# Altium PCB Transmitter.PcbDoc
Units mil, origin at the board's own origin, x right, y up, seen from the top; angles counter-clockwise.
Board outline 3115 x 2620 mil, 4 copper layers (Top Layer 1, Top Layer, Bottom Layer, Bottom Layer 1), stack 23.756 mil thick; 25 components, 10 nets, 67 pads, 13 vias.
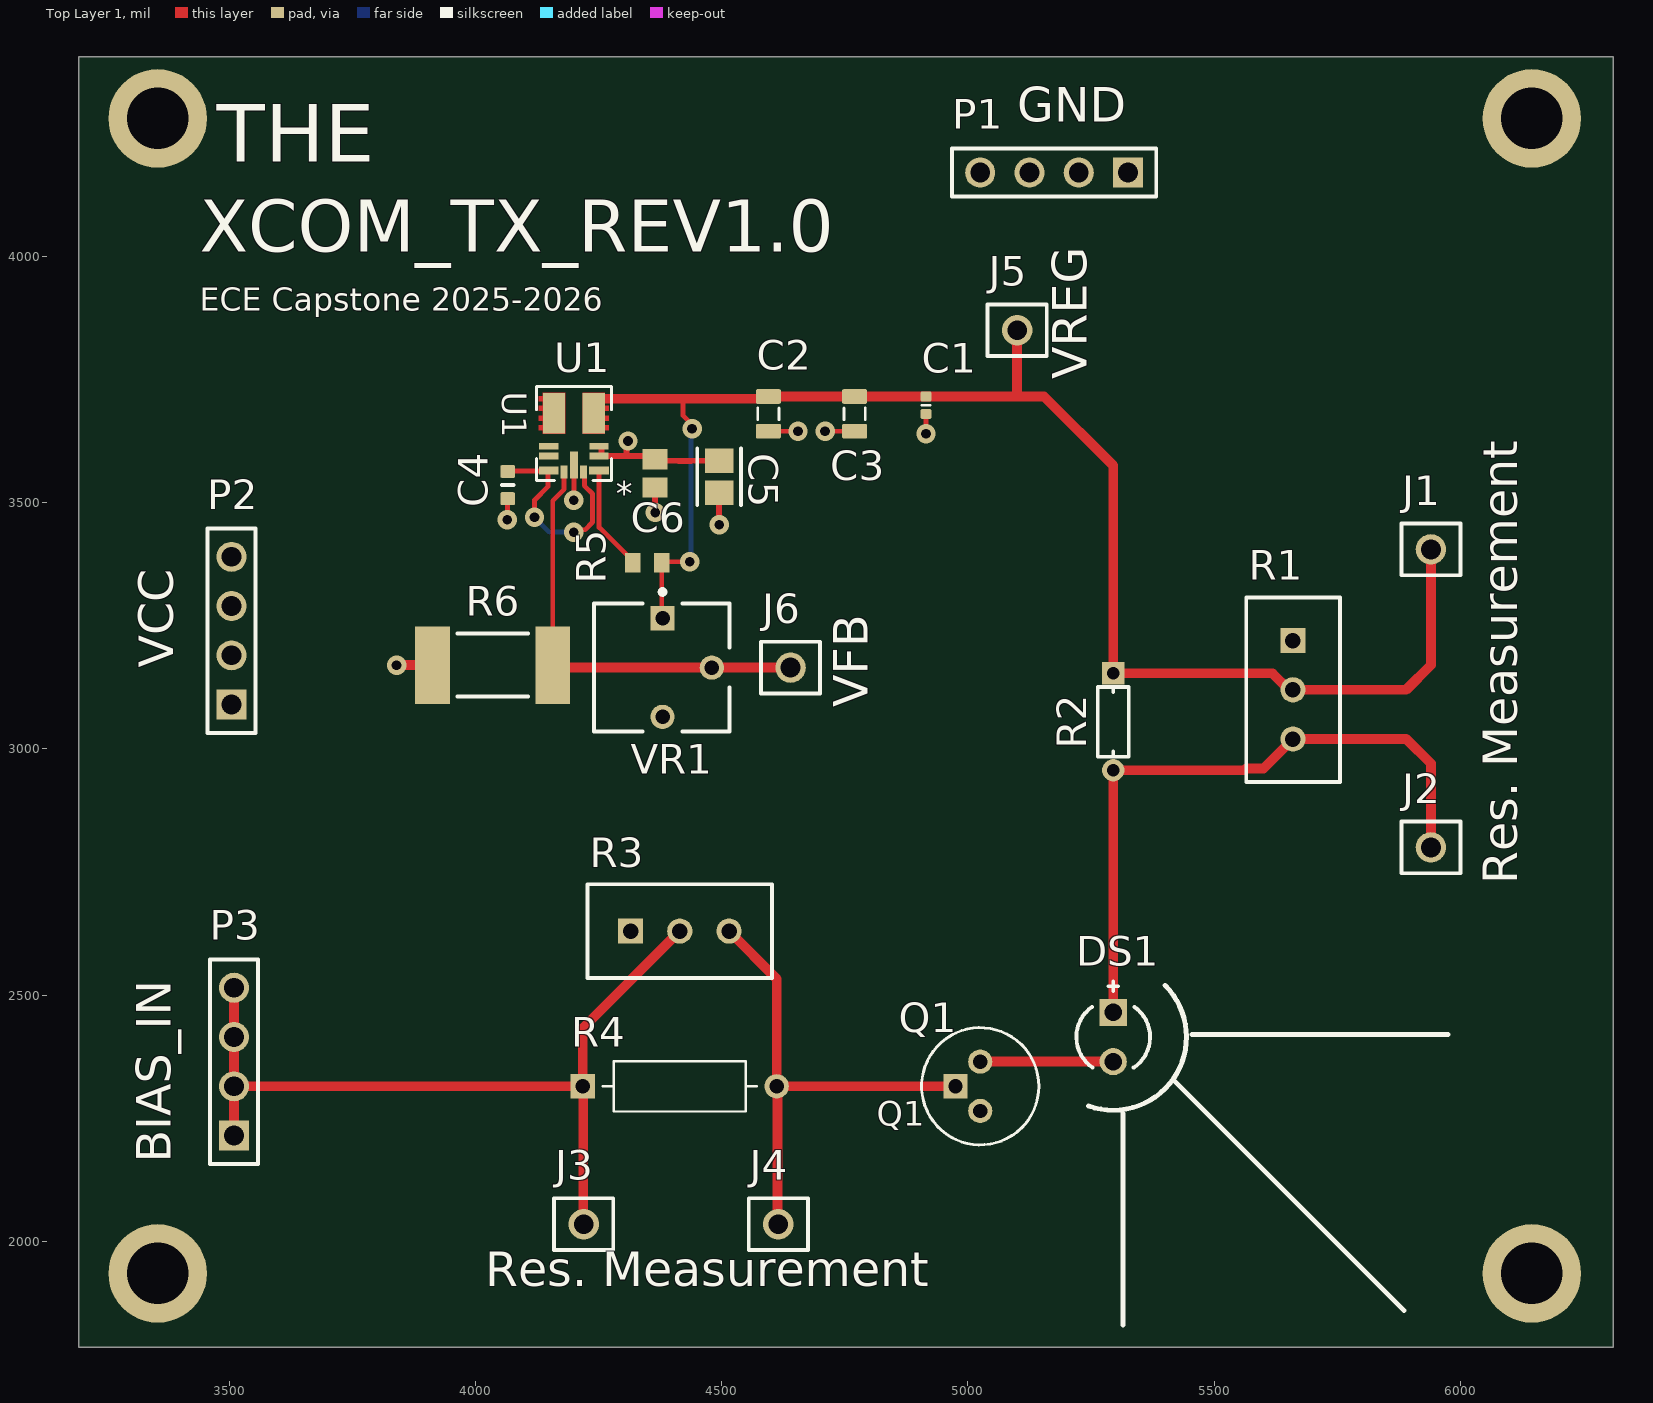
[diagram p0: Top Layer 1 view]
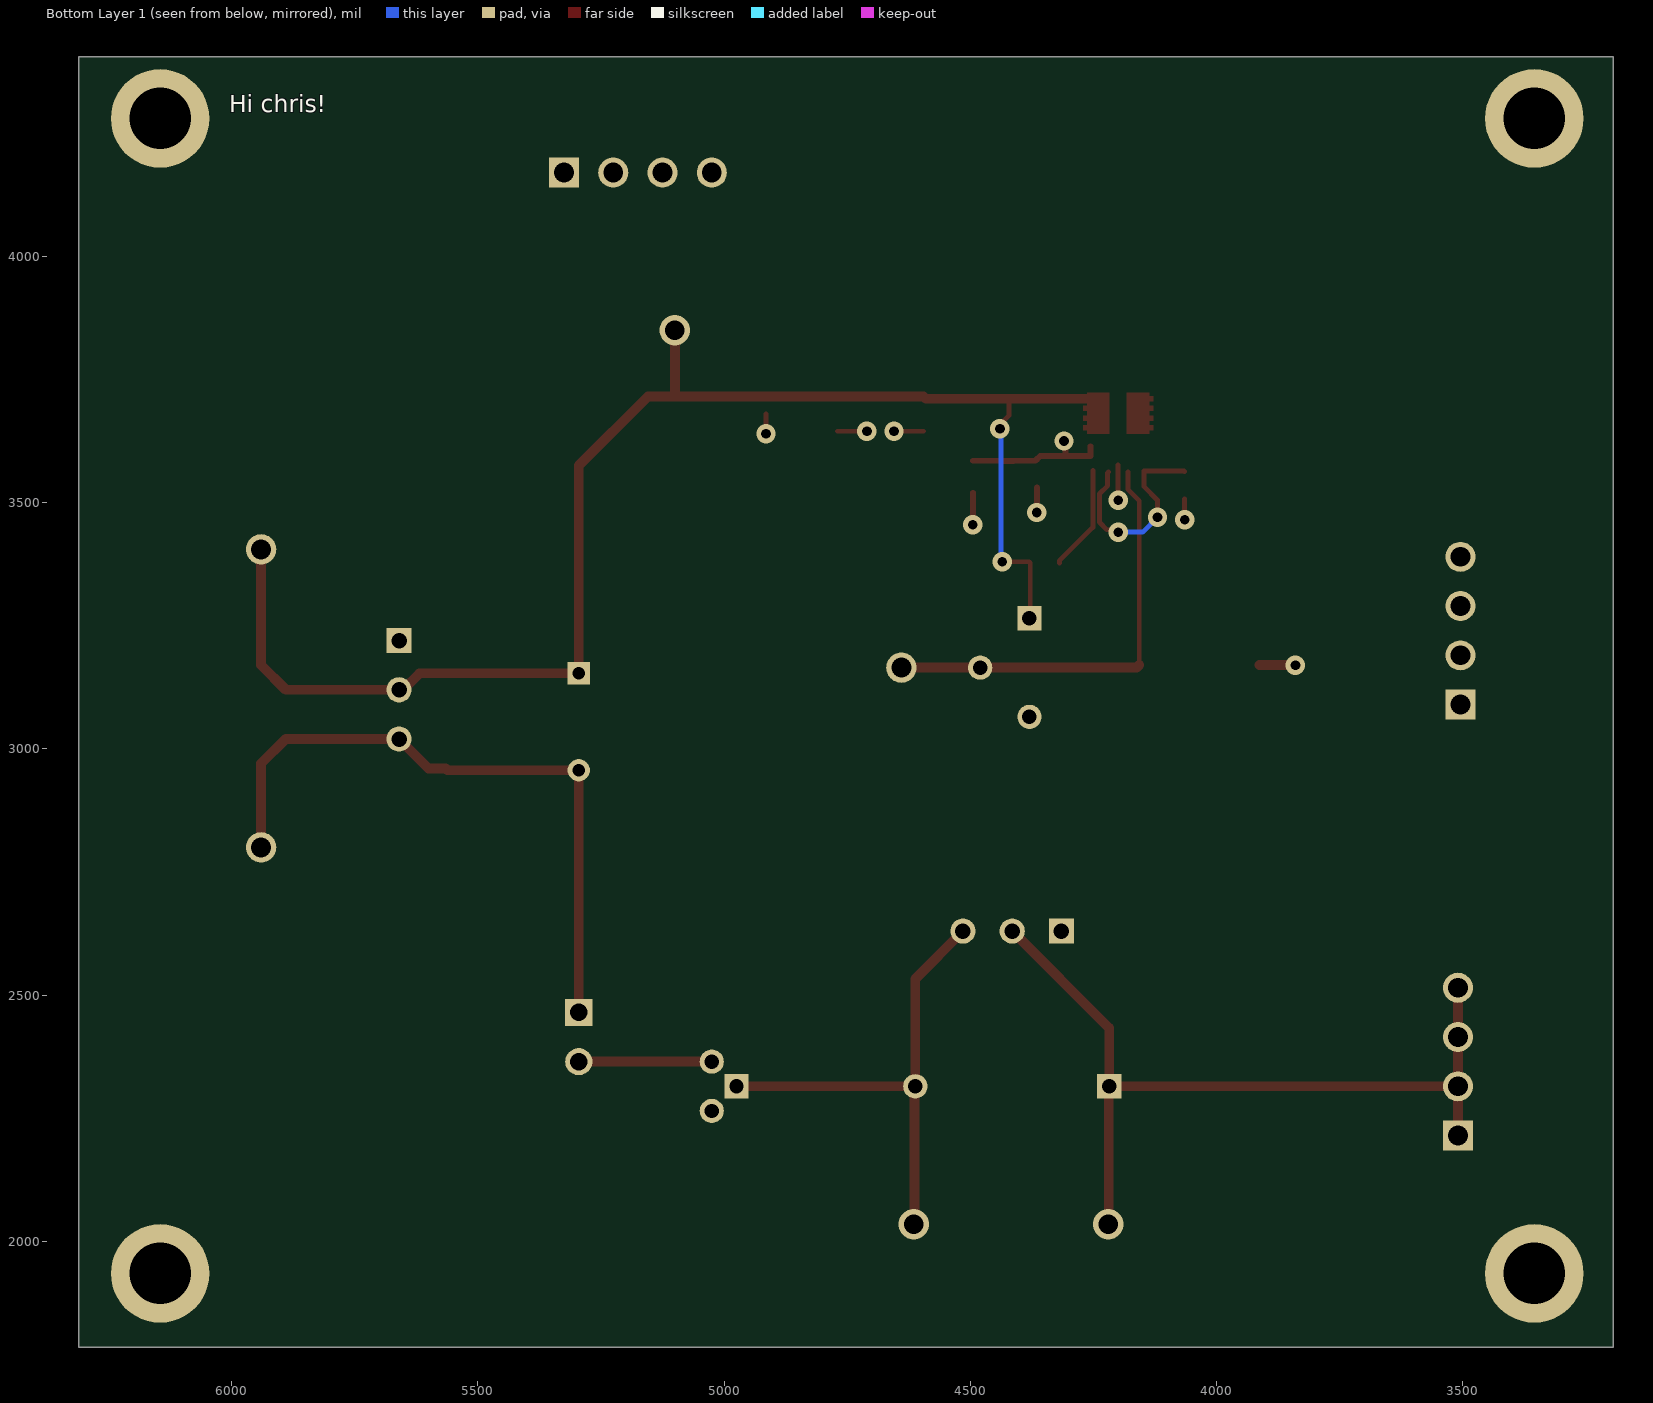
[diagram p1: Bottom Layer 1 view, seen from below]
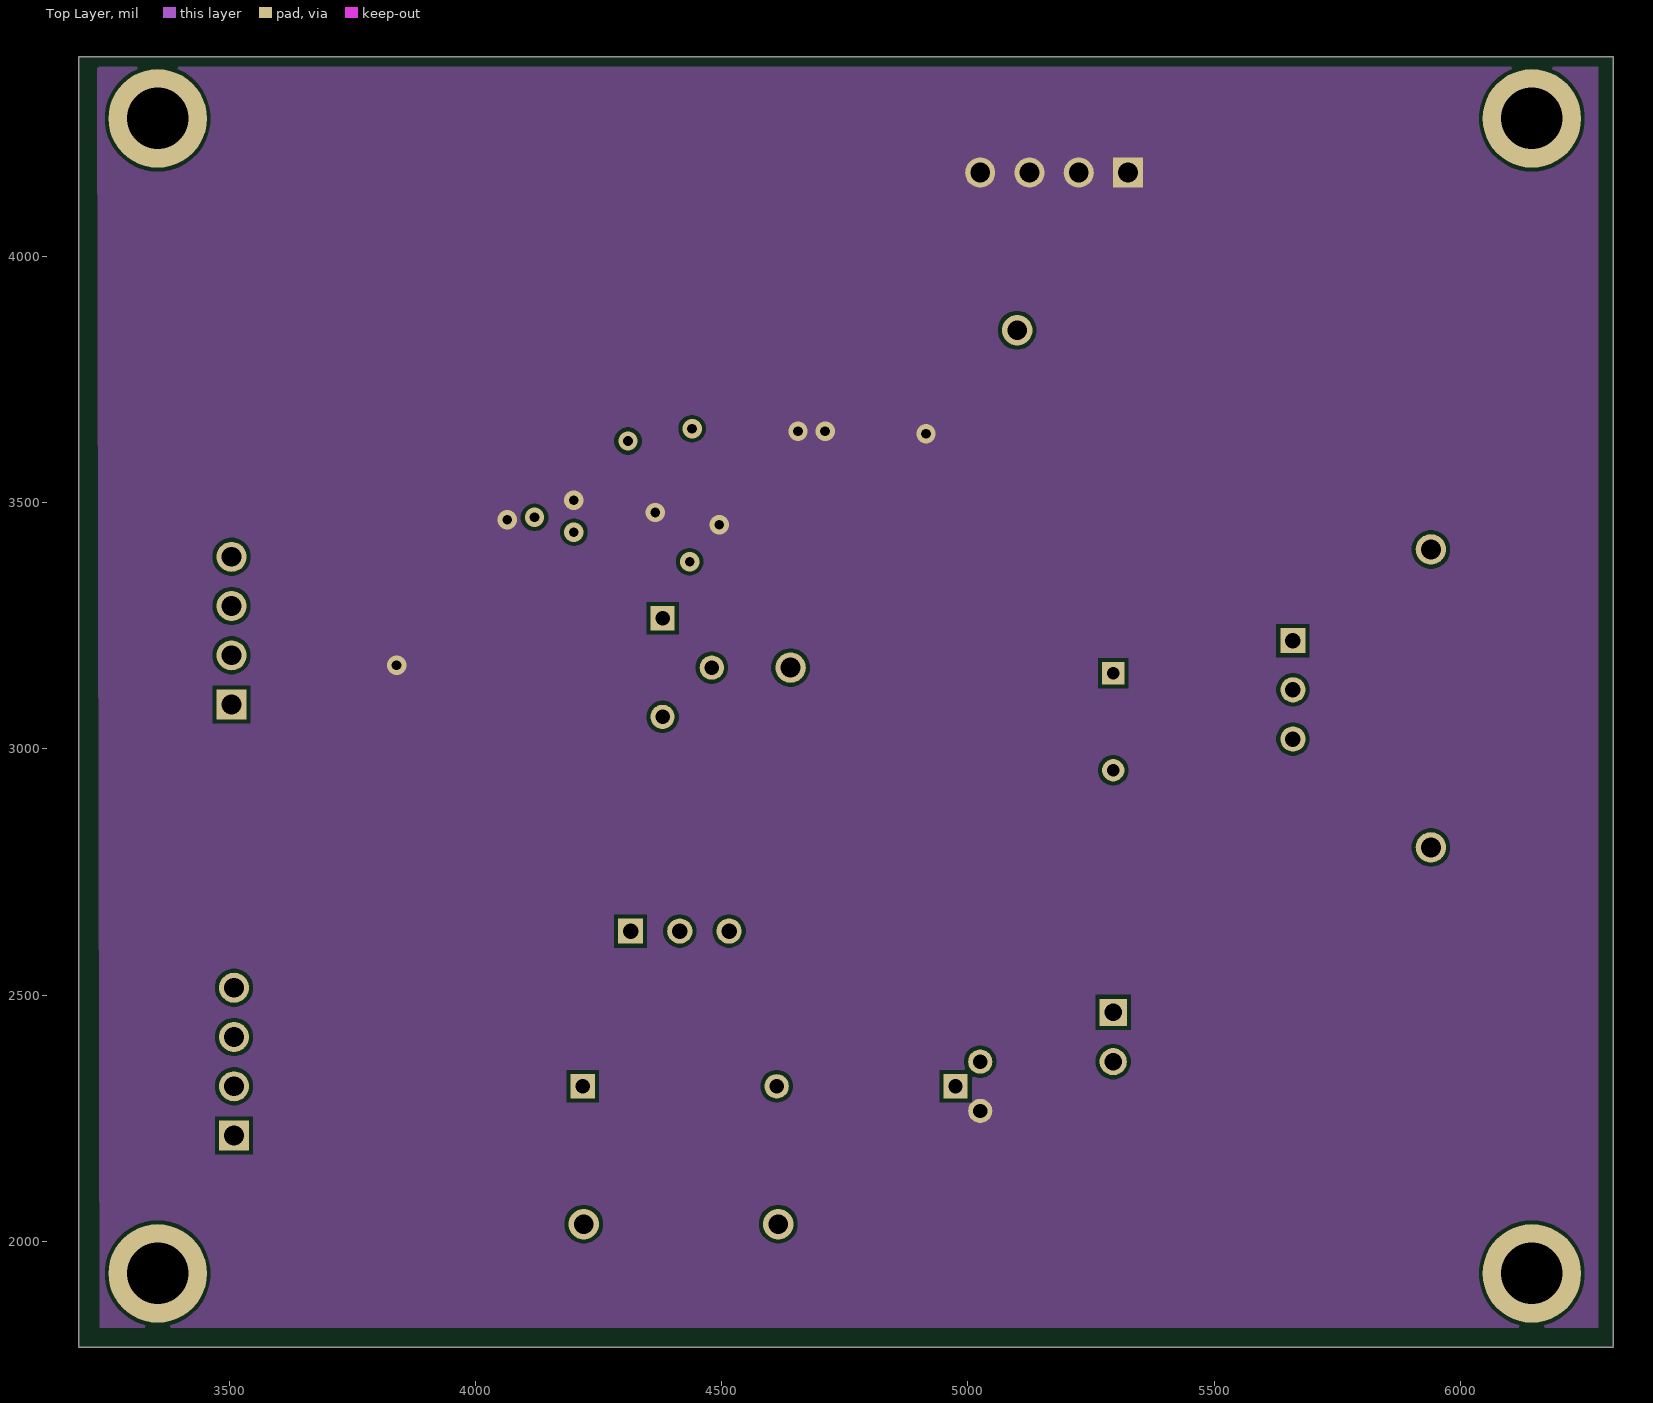
[diagram p2: Top Layer]
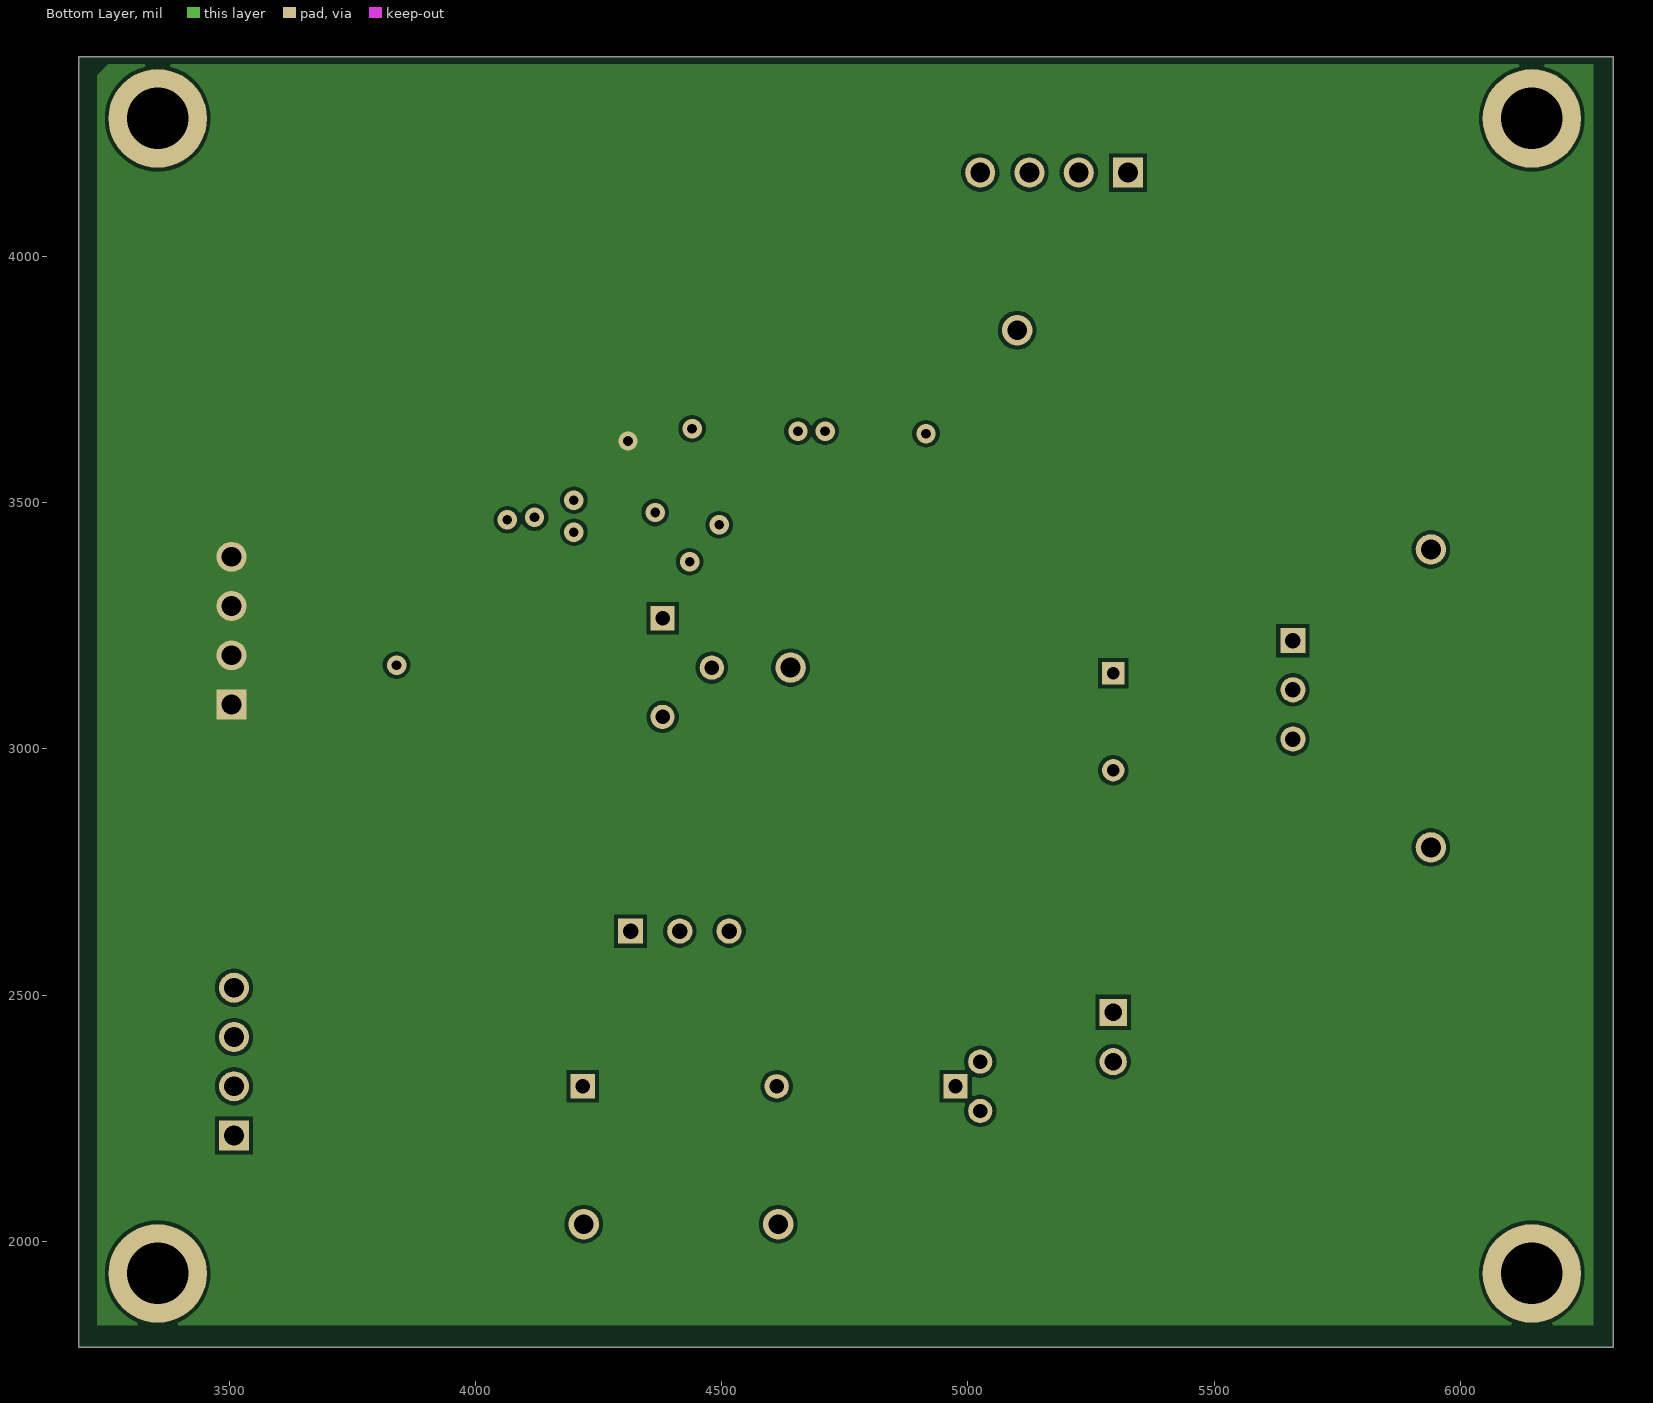
[diagram p3: Bottom Layer]
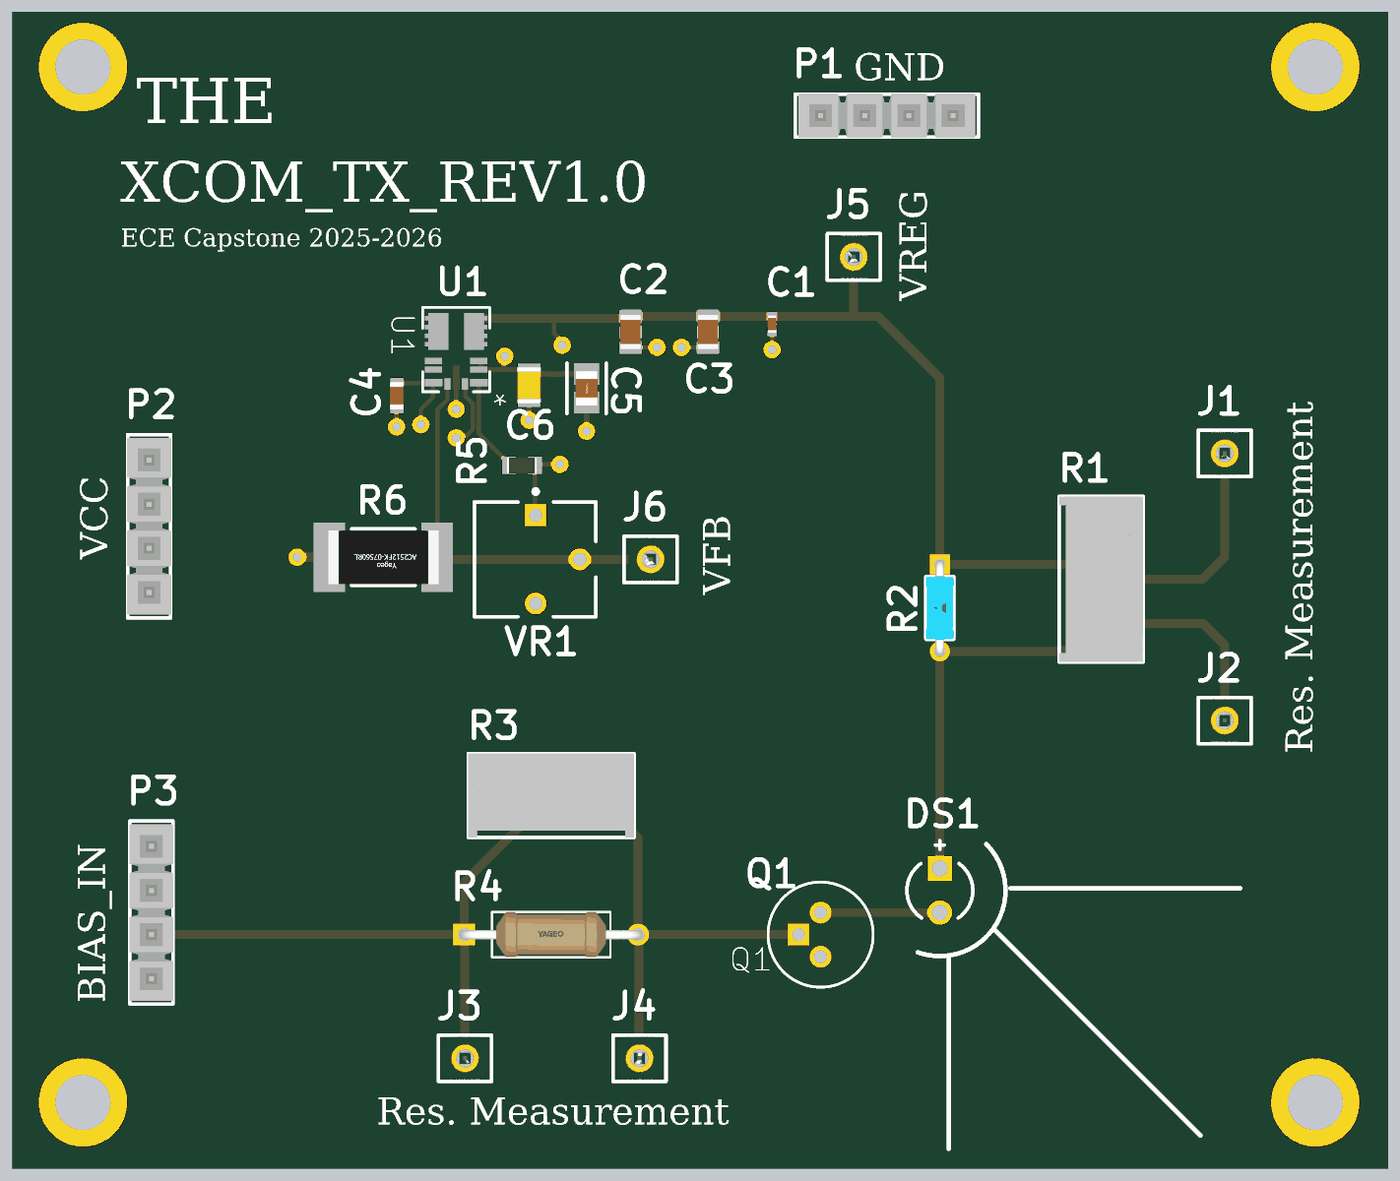
[diagram p4: 3D render of the assembled board from above, using the file's embedded part models]

## Layer stack, top to bottom
Top Solder: solder mask 0.4, Solder Resist, Dk 3.5
Top Layer 1: signal copper 1.378
Dielectric 2: prepreg 2.8, PP-006, Dk 4.1
Top Layer: signal copper 1.4
Dielectric 1: dielectric 12.6, FR-4, Dk 4.8
Bottom Layer: signal copper 1.4
Dielectric 3: prepreg 2.8, PP-006, Dk 4.1
Bottom Layer 1: signal copper 1.378
Bottom Solder: solder mask 0.4, Solder Resist, Dk 3.5

## Board outline
3195,1785 6310,1785 6310,4405 3195,4405

## Design rules (kind name [scope] priority, off if disabled: settings)
AcuteAngle [All] p1: minimum=8.00000000000000E+0001 checktracksonly=FALSE
BoardOutlineClearance "BoardOutlineClearance JLCPCB" [All] p1: gap=11.81 ignorepadtopadclearanceinfootprint=FALSE
Clearance "Clearance JLCPCB 4 layer" [All] p1: gap=7.87 ignorepadtopadclearanceinfootprint=FALSE except(3.54: Arc-Arc Arc-Track Track-Track; 5: Arc-SMDPad Arc-Via Track-SMDPad Track-Via SMDPad-SMDPad; 9.45: THPad-THPad THPad-Via Via-Via; 10: Arc-Hole Track-Hole SMDPad-Hole THPad-Hole Via-Hole Fill-Hole Poly-Hole Region-Hole Text-Hole)
DiffPairsRouting "Diff Pairs USB 2.0" [InDifferentialPairClass('USB 2.0')] p1: maxlimit=5 minlimit=5 mostfreqgap=5 toplayer_minwidth=7.87 toplayer_maxwidth=7.87 toplayer_prefwidth=7.87 midlayer1_minwidth=15 midlayer1_maxwidth=15 midlayer1_prefwidth=15 midlayer2_minwidth=15 midlayer2_maxwidth=15 midlayer2_prefwidth=15 bottomlayer_minwidth=7.87 bottomlayer_maxwidth=7.87 bottomlayer_prefwidth=7.87 impedanceprofiledriven=TRUE impedanceprofileid={9C1C01C3-81FD-4AE1-9E3D-BC841176F5CA} maxuncoupledlength=500
DiffPairsRouting "Diff Pairs PCIe Gen 2" [InDifferentialPairClass('PCIe Gen 2')] p2: maxlimit=5 minlimit=5 mostfreqgap=5 toplayer_minwidth=5.53 toplayer_maxwidth=5.53 toplayer_prefwidth=5.53 midlayer1_minwidth=15 midlayer1_maxwidth=15 midlayer1_prefwidth=15 midlayer2_minwidth=15 midlayer2_maxwidth=15 midlayer2_prefwidth=15 bottomlayer_minwidth=5.53 bottomlayer_maxwidth=5.53 bottomlayer_prefwidth=5.53 impedanceprofiledriven=TRUE impedanceprofileid={D86E5A41-F98B-413D-93FD-A6E48D035561} maxuncoupledlength=500
HoleSize "HoleSize JLCPCB Pad" [IsPad] p1: absolutevalues=TRUE maxlimit=248.03 minlimit=19.68 maxpercent=80.000 minpercent=20.000
HoleSize "HoleSize JLCPCB 4 layer Cheap" [All] p2: absolutevalues=TRUE maxlimit=248.03 minlimit=11.81 maxpercent=80.000 minpercent=20.000
HoleToHoleClearance "HoleToHoleClearance JLCPCB Same Net" [All] p1: gap=10 allowstackedmicrovias=TRUE
MinimumAnnularRing "MinimumAnnularRing JLCPCB Via" [All] p1: minimumring=2.95
MinimumAnnularRing "MinimumAnnularRing JLCPCB Pad" [IsPad] p2: minimumring=9.84
MinimumAnnularRing "MinimumAnnularRing JLCPCB 1oz" [All] p3: minimumring=5.12
MinimumSolderMaskSliver "MinimumSolderMaskSliver JLCPCB" [All] p1: minsoldermaskwidth=3.94
PlaneClearance [All] p1: clearance=11.81
PlaneConnect [All] p1: planeconnectstyle=Direct reliefexpansion=20 reliefentries=4 reliefconductorwidth=10 reliefairgap=10
PolygonConnect [All] p1: connectstyle=Direct reliefconductorwidth=15 reliefentries=4 polygonreliefangle="45 Angle" airgapwidth=10
RoutingVias "RoutingVias JLCPCB 4 layer" [All] p1: holewidth=19.68 width=39.37 viastyle="Through Hole" minholewidth=11.81 minwidth=17.72 maxholewidth=50 maxwidth=80 viatemplateguid#1={1FF1CE2E-D4DA-45DD-BA18-462DD51CCE8B} viatemplateguid#2={A26B80D9-3972-439C-BF20-AF114F6C39ED} viatemplateguid#3={94EF3918-7136-44E3-8D4D-2DFBB820EAE1} viatemplatename#1=v50h30m0mx0(Tol13-8) viatemplatename#2=v65h40m0mx0(Tol13-8) viatemplatename#3=v80h50m0mx0(Tol13-8)
SilkToSilkClearance [All] p1: silktosilkclearance=3
SilkToSolderMaskClearance "SilkToSolderMaskClearance JLCPCB" [IsPad] p1: minsilkscreentomaskgap=5.91 clearancetoexposedcopper=TRUE
SolderMaskExpansion "SolderMaskExpansion JLCPCB" [All] p1: expansion=1.5 istentingtop=FALSE
UnRoutedNet [All] p1: checkbadconnections=TRUE
Width "Width JLCPCB 4 layer" [All] p1: maxlimit=196.85 minlimit=3.54 preferedwidth=9.84 minimp=50.000000 maximp=50.000000 favimp=50.000000
21 further rules are at their usual default settings.

## Components (designator, comment, footprint, x,y, rotation, side; value= is the part's Value field where it differs from the comment)
C1 "Capacitor 100nF +/-20% 50V 0402" CAPC0402(1005)60_L 4915,3697.72 r270 top value=100nF
C2 "Capacitor 22µF +/-40% 16V 0805" CAPC0805(2012)145_L 4595,3680.04 r270 top value=22µF
C3 "Capacitor 22µF +/-40% 16V 0805" CAPC0805(2012)145_L 4770,3680.04 r270 top value=22µF
C4 "Capacitor 1µF +/-0.1% 25V 0603" CAPC0603(1608)100_L 4065.66,3535.66 r270 top value=1µF
C5 "GRM21BD72A225ME01K" FP-GRM21B-0_2-e0_2_0_7-IPC_B 4495,3552.49 r270 top
C6 "Capacitor 100 nF +/-10% 50 V 0805" CAPC2013X95X50LL10T25 4365,3559.37 r270 top value=100nF
DS1 "LTL-1CHE" INDPR60-254-520X380X650 5295,2415 r270 top
J1 "PBC01SAAN" FP-PBC01SAAN-MFG 5940,3405 r0 top
J2 "PBC01SAAN" FP-PBC01SAAN-MFG 5940,2800 r0 top
J3 "PBC01SAAN" FP-PBC01SAAN-MFG 4220,2035 r0 top
J4 "PBC01SAAN" FP-PBC01SAAN-MFG 4615,2035 r0 top
J5 "PBC01SAAN" FP-PBC01SAAN-MFG 5100,3850 r0 top
J6 "PBC01SAAN" FP-PBC01SAAN-MFG 4640,3165 r180 top
P1 "HMTSW-104-23-L-S-237" SMTC-HMTSW-104-23-X-S-237 5325,4170 r180 top
P2 "HMTSW-104-23-L-S-237" SMTC-HMTSW-104-23-X-S-237 3505,3090 r90 top
P3 "HMTSW-104-23-L-S-237" SMTC-HMTSW-104-23-X-S-237 3510,2215 r90 top
Q1 "2N2369A" TO-18_STM 4975,2315 r0 top
R1 "3296W-1-102LF" BOUR-3296W-1-3 5660,3120 r270 top
R2 "MBA02040C2200FC100" FP-MBA0204-MFG 5295,3055 r270 top value=220Ω
R3 "3296W-1-102LF" BOUR-3296W-1-3 4415,2630 r0 top
R4 "FMP100JT-52-1K" FP-FMP100-MFG 4415,2315 r0 top
R5 "Resistor 100k +/-1% 0603 100 mW" RESC1608X55X25ML10T15 4348.83,3377.76 r180 top value=100k
R6 "AC2512FK-0710KL" FP-AC2512-MFG 4035,3170 r180 top value=10KΩ
U1 "TPSM365R3FRDNR" QFN-FCMOD_365R6FRDN_TEX 4200,3640 r180 top
VR1 "3362P-1-104LF" BOUR-3362P 4378.62,3165 r270 top

## Footprints (in the part's own frame and the unit in brackets; to place one, negate y for a bottom-side part, rotate by r counter-clockwise, add the part's x,y. Pads: shape width x height; smd on the part's side, far side on the other; paste and mask are expansions set on the pad)
BOUR-3296W-1-3 [mm] "THD, 3-Leads, Body 9.53x4.83mm, Pitch 2.54mm"
  rect 1.3x1.3 hole 0.8: 1(-2.54,0)
  round 1.3 hole 0.8: 2(0,0) 3(2.54,0)
  silkscreen extent -4.76,-2.41 4.76,2.42, body extent -4.76,-2.41 4.76,2.42, height 11.55
BOUR-3362P [mm] "THD, 3-Leads, Body 6.6x6.99mm, Pitch 2.54mm"
  rect 1.25x1.25 hole 0.75: 1(-2.54,0.035)
  round 1.25 hole 0.75: 2(0,2.575) 3(2.54,0.035)
  silkscreen extent -4.02,-3.49 3.3,3.5, body extent -3.3,-3.49 3.3,3.49, height 4.95
CAPC0402(1005)60_L [mm] "Chip Capacitor, Body 1.0x0.5mm, Height 0.6mm, IPC High Density"
  rrect25% 0.5x0.55 smd: 1(-0.45,0) 2(0.45,0)
  silkscreen extent 0,-0.2 0,0.2, body extent -0.5,-0.25 0.5,0.25, height 0.6
CAPC0603(1608)100_L [mm] "Chip Capacitor, Body 1.6x0.8mm, Height 1.0mm, IPC High Density"
  rrect25% 0.66x0.76 smd: 1(-0.7,0) 2(0.7,0)
  silkscreen extent 0,-0.3 0,0.3, body extent -0.8,-0.4 0.8,0.4, height 0.95
CAPC0805(2012)145_L [mm] "Chip Capacitor, Body 2.0x1.2mm, Height 1.45mm, IPC High Density"
  rrect25% 0.76x1.3 smd: 1(-0.9,0) 2(0.89,0)
  silkscreen extent -0.3,-0.55 0.3,0.55, body extent -1,-0.6 1,0.6, height 1.45
CAPC2013X95X50LL10T25 [mm] "Chip Capacitor, 2-Leads, Body 2.10x1.35mm, IPC High Density"
  rect 1.05x1.3 smd: 1(-0.725,0) 2(0.725,0)
  body extent -1.05,-0.67 1.05,0.67, height 0.95
FP-AC2512-MFG [mm]
  rect 1.8x4 smd paste+0 mask+0: 1(-3.1,0) 2(3.1,0)
  silkscreen extent -1.83,-1.63 1.83,1.63, body extent -4.1,-2.1 4.1,2.1, height 0.25
FP-FMP100-MFG [mm]
  rect 1.25x1.25 hole 0.75 paste-2539.97 mask+0: 1(-5,0)
  round 1.25 hole 0.75 paste-2539.97 mask+0: 2(5,0)
  silkscreen extent -3.98,-1.3 3.98,1.3, body extent -5.72,-1.4 5.72,1.4, height 0.25
FP-GRM21B-0_2-e0_2_0_7-IPC_B [mil]
  rect 49.4x57.33 smd paste+0 mask+0: 1(-32.51,0) 2(32.51,0)
  silkscreen extent -57,-44 57,44, body extent -67,-39 67,39, height 10
FP-MBA0204-MFG [mm]
  rect 1.15x1.15 hole 0.65 paste-2539.97 mask+0: 1(-2.5,0)
  round 1.15 hole 0.65 paste-2539.97 mask+0: 2(2.5,0)
  silkscreen extent -1.8,-0.8 1.8,0.8, body extent -3.17,-0.9 3.17,0.9, height 0.25
FP-PBC01SAAN-MFG [mm]
  round 1.57 hole 1.02 paste-2539.97 mask+0: 1(0,0)
  silkscreen extent -1.53,-1.34 1.53,1.34, body extent -1.63,-1.44 1.63,1.44, height 0.25
INDPR60-254-520X380X650 [mm] "THD, 2-Leads, Dia 3.8mm, Pitch 2.54mm"
  rect 1.4x1.4 hole 0.9: 1(-1.27,0)
  round 1.4 hole 0.9: 2(1.27,0)
  silkscreen extent -2.87,-1.9 1.58,1.9, body extent -1.9,-1.9 1.9,1.9, height 6.5
QFN-FCMOD_365R6FRDN_TEX [mil]
  rect 40x17 smd paste+0 mask+0: 1(-51.18,74.81) 8(51.18,74.81)
  rect 39x14 smd paste+0 mask+0: 2(-51.18,45.28) 3(-51.18,25.59) 6(51.18,25.59) 7(51.18,45.28)
  rect 45x83 smd paste+0 mask+0: 4(-40.51,-41.35) 5(40.51,-41.35)
  rect 14x26 smd paste+0 mask+0: 9(19.69,77.76) 11(-19.69,77.76)
  rect 16x55 smd paste-27.5 mask-27.5: 10(0,63.26)
  Top Layer 1 region: 63.01,-82.85 18.01,-82.85 18.01,0.15 63.01,0.15 63.01,-6.82 71.01,-6.82 71.01,-16.82 63.01,-16.82 63.01,-26.5 71.01,-26.5 71.01,-36.5 63.01,-36.5 63.01,-46.19 71.01,-46.19 71.01,-56.19 63.01,-56.19 63.01,-65.87 71.01,-65.87 71.01,-75.87 63.01,-75.87
  Top Layer 1 region: -18.01,0.15 -18.01,-82.85 -63.01,-82.85 -63.01,-75.87 -71.01,-75.87 -71.01,-65.87 -63.01,-65.87 -63.01,-56.19 -71.01,-56.19 -71.01,-46.19 -63.01,-46.19 -63.01,-36.5 -71.01,-36.5 -71.01,-26.5 -63.01,-26.5 -63.01,-16.82 -71.01,-16.82 -71.01,-6.82 -63.01,-6.82 -63.01,0.15
  silkscreen extent -76,-96 76,96
RESC1608X55X25ML10T15 [mm] "Chip Resistor, 2-Leads, Body 1.70x0.90mm, IPC Low Density"
  rect 0.8x1 smd: 1(-0.75,0) 2(0.75,0)
  body extent -0.85,-0.45 0.85,0.45, height 0.55
SMTC-HMTSW-104-23-X-S-237 [mm] "Terminal Strip, 1x2 Pins, Vertical, 2.54mm Pitch, Male"
  rect 1.55x1.55 hole 1.02: 1(0,0)
  round 1.55 hole 1.02: 2(2.54,0) 3(5.08,0) 4(7.62,0)
  silkscreen extent -1.46,-1.24 9.08,1.24, body extent -1.27,-1.27 8.89,1.27, height 8.56
TO-18_STM [mil]
  rect 49x49 hole 29 paste-99999 mask+0: 1(0,0)
  round 49 hole 29 paste-99999 mask+0: 2(50,-50) 3(50,50)
  silkscreen extent -69,-119 169,119

## Part data
C1: library part CMP-001-00067-3, "Chip Capacitor, 100nF +/-20%, 50V, 0402, Thickness 0.6 mm", Case/Package=0402, Max Operating Temperature=85°C, Min Operating Temperature=-55°C, Tolerance=10%, Voltage Rating=50V, Mounting Technology=SMT, Pins=2
C2 C3: library part CMP-001-00081-4, "Chip Capacitor, 22µF +/-40%, 16V, 0805, Thickness 1.45 mm", Case/Package=0805, Max Operating Temperature=85°C, Min Operating Temperature=-55°C, Tolerance=5%, Voltage Rating=16V, Mounting Technology=SMT, Pins=2
C4: library part CMP-001-00055-4, "Chip Capacitor, 1µF +/-0.1%, 25V, 0603, Thickness 1 mm", Case/Package=0603, Max Operating Temperature=85°C, Min Operating Temperature=-55°C, Tolerance=20%, Voltage Rating=25V, Mounting Technology=SMT, Pins=2
C5: library part CMP-06035-063309-1, "CAP CER 2.2UF 100V X7T 0805"
C6: library part CMP-001-00018-6, "Chip Capacitor, 100 nF, +/- 10%, 50 V, 0805 (2012 Metric)", Capacitor Type=Ceramic, Case/Package=0805, Max Operating Temperature=125°C, Min Operating Temperature=-55°C, Tolerance=10%, Voltage Rating=50V, Mounting Technology=SM, Pins=2, RoHS Compliant=True
DS1: library part CMP-007-00018-2, "LED Uni-Color Red, 100 mW, 30 mA, -55 to 100 degC, 2-Pin THD, RoHS, Bulk", Case/Package=Radial, Colour=Red, Forward Current=20mA, Forward Voltage=2V, Manufacturer=Lite-On, Max Operating Temperature=100°C, Min Operating Temperature=-55°C, Package Description="2-Pin Through Hole Device, Dia 3.8 mm, Pitch 2.54 mm", Package Quantity=1000, Datasheet URL=https://datasheet.ciiva.com/15117/getdatasheetpartid-187746-15117985.pdf, Datasheet Version=Dec-03, Illumination Colour=Red, Lens Style=Dome, Luminous Intensity=12.6mcd, Manufacturer URL=http://www.us.liteon.com/, Mounting Technology=TH, Nominal Vf=2V, Package Reference=LTL-1CHE, Packaging=Bulk, Pins=2, RoHS Compliant=True, Viewing Angle=60degrees
J1 J2 J3 J4 J5 J6: library part CMP-25680-000032-1, "CONN HEADER VERT 1POS", Color=Black, Package Quantity=1, Connector Type="Male Pin", Contact Material=Bronze, Contact Mating Length=0.23inch, Contact Plating=Gold, Gender=Male, Height=2.54mm, Housing Color=Black, Housing Material=Plastic, Lead Free="Lead Free", Length=2.54mm, Mount="Through Hole", Number of Contacts=1, Number of Positions=1, Number of Rows=1, Packaging=Bulk, Pitch=2.54mm, Termination=Solder, Width=2.54mm
P1 P2 P3: library part CMP-1024-00020-1, "Modified .025\" SQ Post Header, Through-hole, Vertical, -55 to 125 degC, 2.54 mm Pitch, 4-Pin, Male, RoHS", Manufacturer=Samtec, Temperature Range="-55 to 125 degC", ComponentLink1Description="Manufacturer URL", ComponentLink1URL=http://www.samtec.com, ComponentLink2Description=Datasheet, ComponentLink2URL=http://www.samtec.com/documents/webfiles/pdf/HMTSW.PDF, ComponentLink3Description="Package Specification", ComponentLink3URL=http://www.samtec.com/documents/webfiles/cpdf/HMTSW-XXX-XX-X-X-XXXX-XX-XX-MKT1.pdf, DatasheetVersion=F-214, Mounting Technology=Through-hole, Orientation=Vertical, PackageDescription="Assembly .025 [.64] SQ. Post Hi-Temp Terminal Strip", PackageReference=HMTSW-104-23-X-S-237, PackageVersion="AL, 3/1987", PartNumber=HMTSW-104-23-L-S-237, Pitch="2.54 mm", RoHS=True
Q1: library part CMP-010-000000-1, "Description", Manufacturer_Name=STMicroelectronics, Copyright="Copyright (C) 2025 Ultra Librarian. All rights reserved.", Design Item ID=2N2369A, Manufacturer_Part_Number=2N2369A, Source=2N2369A.SchLib
R1 R3: library part CMP-009-00037-2, "Square Trimpot(R) Trimming Potentiometer, 1000 Ohm, -55 to 125 degC, 3-Pin THD, RoHS, Tube", Case/Package=3296W-1-3, Manufacturer=Bourns, Max Operating Temperature=150°C, Min Operating Temperature=-55°C, Package Description="3-Pin Through Hole Device, Body 9.53 x 4.83 mm, Pitch 2.54 mm", Package Quantity=50, Power=500mW, Resistance=1k, Tolerance=10%, Voltage Rating=300V, Composition=Potentiometer, Datasheet URL=http://www.bourns.com/docs/Product-Datasheets/3296.pdf, Datasheet Version=May-16, Manufacturer URL=http://www.bourns.com/, Mounting Technology=TH, Package Reference=3296W-1-3, Packaging=Rail/Tube, RoHS Compliant=True
R2: library part CMP-02408-000005-1, "RES 220 OHM 0.4W 1% AXIAL", Manufacturer="Vishay BC Components", Package=MBA0204, Power Rating=0.25W, Resistance=220Ω, Temperature="-55°C to +125°C", Temperature Coefficient=50ppm/°C, Temperature Range High=+125°C, Temperature Range Low=-55°C, Tolerance=1%, Voltage Rating=200V, Automotive=Yes, Automotive Grade="Grade 1", Category=Res, ComponentLink2Description=Datasheet, ComponentLink2URL=http://www.vishay.com/docs/28766/mbxsma.pdf, Composition="Metal Film", Device Class L1="Passive Components", Device Class L2=Resistors, Device Class L3="Through-Hole Resistors", Digikey Description="RES 220 OHM 0.4W 1% AXIAL", Height=1.6mm, Ipc Land Pattern Name=RESAD500W65L360D160, Lead Free=Yes, Manufacturer Part Number=MBA02040C2200FC100, Mouser Description="Thin Film Resistors - Through Hole .4watt 220ohms 1% 1/8watt body size", Octopart=https://octopart.com/mba02040c2200fc100-vishay-43743094, RoHS=TRUE, Series="MBA/SMA 0204"
R4: library part CMP-00621-25629781-1, "Resistor, 1 kOhm, ± 5%, 1 W, Axial Leaded, Metal Film, High Power Flame Proof", Case/Package=Conformal, Max Operating Temperature=155°C, Min Operating Temperature=-55°C, Power Rating=1W, Resistance=1kΩ, Temperature Coefficient=100ppm/°C, Tolerance=5%, Composition="Metal Film", Diameter=2.4mm, Lead Free="Lead Free", Length=6.3mm, Military Standard=Not, Mount="Through Hole", Radiation Hardening=No, RoHS=Compliant, Schedule B="8533210090, 8533210090", Termination=Axial
R5: library part CMP-009-00023-5, "Chip Resistor, 100 KOhm, +/- 1%, 0.1 W, -55 to 155 degC, 0603 (1608 Metric)", Case/Package=0603, Max Operating Temperature=155°C, Min Operating Temperature=-55°C, Power=100mW, Tolerance=1%, Voltage Rating=50V, Mounting Technology=SM, Pins=2, RoHS Compliant=True
R6: library part CMP-03412-001312-1, "RES SMD 10K OHM 1% 1W 2512", Manufacturer=Yageo, Package=AC2512, Power Rating=1W, Resistance=10KΩ, Temperature="-55°C to +155°C", Temperature Range High=+155°C, Temperature Range Low=-55°C, Tolerance=0.01, Voltage Rating=200V, Automotive=Yes, Automotive Grade="Grade 0", Category=Res, ComponentLink2Description=Datasheet, ComponentLink2URL=http://www.yageo.com/documents/recent/PYu-AC_51_RoHS_L_6.pdf, Composition="Thick Film", Device Class L1="Passive Components", Device Class L2=Resistors, Device Class L3="Chip SMD Resistors", Digikey Description="RES SMD 10K OHM 1% 1W 2512", Footprint Url=http://www.yageo.com/exep/pages/download/literatures/PYu-R_Mount_10.pdf, Height=0.65mm, Ipc Land Pattern Name=RESC635310X55, Lead Free=Yes, Manufacturer Part Number=AC2512FK-0710KL, Octopart=https://octopart.com/ac2512fk-0710kl-yageo-71369732, RoHS=TRUE, Series=AC
U1: library part CMP-007-000000-1, "3-V to 65-V input, 1-V to 13-V output, 0.3-A synchronous buck converter power module 11-QFN-FCMOD -40 to 125", Manufacturer_Name="Texas Instruments", Copyright="Copyright (C) 2025 Ultra Librarian. All rights reserved.", Design Item ID=TPSM365R3FRDNR, Manufacturer_Part_Number=TPSM365R3FRDNR, RefDes=RefDes, Source=TPSM365R3FRDNR.SchLib, Type="DC DC Converters"
VR1: library part CMP-1747-00003-1, "Square Trimpot(R) Trimming Potentiometer, 100 KOhm, 300 V, -55 to 125 degC, 3-Pin THD, RoHS, Tube", Case\Package=Axial, Max Operating Temperature="155 degC", Min Operating Temperature="-55 degC", Package Quantity=200, Power Rating="250 mW", Resistance="1 mohm", Tolerance=1%, Voltage Rating="250 V", ComponentLink1Description="Manufacturer URL", ComponentLink1URL=http://www.bourns.com/, ComponentLink2Description=Datasheet, ComponentLink2URL=http://www.bourns.com/docs/Product-Datasheets/3362.pdf, DatasheetVersion=May-16, Length="0.248 inch", Mount="Through Hole", PackageDescription="3-Pin Through Hole Device, Body 6.6 x 6.99 mm, Pitch 2.54 mm", PackageReference=3326P, Packaging=Bulk, RoHSCompliant=true

## Free pads (board coordinates)
  round 200 hole 125 unplated: 2(3355,1935) 2(3355,4280) 2(6145,1935) 2(6145,4280)

## Via types
v1: diameter 39.37, hole 19.68, Top Layer 1 to Bottom Layer 1, 13 vias

## Nets (pads, with @x,y where several pads share a name; then routed paths per layer and width w, separated by ;. In a path a pad name is that pad's centre, name@x,y a point inside that pad or via, vN(x,y) a via of type N, cw(c..) or ccw(c..) an arc to the next point about the centre after c; other vN are vias at no path point)
Bias_in: J3.1 P3.1 P3.2 P3.3 P3.4 R3.2 R4.1 | length 1685.5
  Top Layer 1 w20: P3.1 P3.2 ; P3.4 P3.3 P3.2 ; J3.1 4219.07,2035.93 4219.07,2314.07 R4.1 ; R3.2 4218.15,2433.15 R4.1 ; P3.2 R4.1
GND: C1.2 C2.2 C3.2 C4.2 C5.2 C6.2 P1.1 P1.2 P1.3 P1.4 Q1.2 R6.2 U1.10 | length 462.9
  Top Layer 1 w9.84: C2.2 v1(4655,3645) ; v1(4710,3645) C3.2 ; v1(4915,3640) C1.2
  Top Layer 1 w10: v1(4065,3465) C4.2@4065,3507.44 ; v1(4200,3505) U1.10
  Top Layer 1 w12: v1(4365,3480) C6.2 ; v1(4495,3455) C5.2
  Top Layer 1 w20: v1(3840,3170) R6.2
NetDS1_1: DS1.1 J2.1 R1.3 R2.2 | length 1353.6
  Top Layer 1 w20: DS1.1 R2.2 5561.57,2956.57 5565,2960 5600,2960 R1.3 5890,3020 5940,2970 J2.1
NetDS1_2: DS1.2 Q1.3 | length 270
  Top Layer 1 w20: Q1.3 DS1.2
NetJ4_1: J4.1 Q1.1 R3.3 R4.2 | length 999.6
  Top Layer 1 w20: R3.3 4611.85,2533.15 R4.2 ; J4.1 4613.43,2036.57 4613.43,2313.43 R4.2 ; Q1.1 R4.2
Pgood: R5.2 U1.1 | length 215.7
  Top Layer 1 w9.84: U1.1 4251.18,3449.82 4319.31,3381.69 R5.2
Regulator_out: C1.1 C2.1 C3.1 J1.1 J5.1 R1.2 R2.1 R5.1 U1.4 VR1.1 | length 3119
  Top Layer 1 w9.84: VR1.1 4378.36,3266.64 R5.1 4380.6,3380 v1(4435,3380) ; 4421.7,3710.87 4421.7,3676.29 4440,3657.99 v1(4440,3650)
  Top Layer 1 w10: C2.1@4590.4,3710.87 C2.1
  Top Layer 1 w20: U1.4 4240.51,3698.37 4253.01,3710.87 4421.7,3710.87 C2.1@4590.4,3710.87 ; C2.1 C3.1 4914.98,3715.45 5100,3715.43 ; J5.1 5100,3715.43 ; J1.1 5940,3170 5890,3120 R1.2 5651.56,3120 5618.14,3153.43 R2.1 5295,3575 5154.57,3715.43 5100,3715.43
  Bottom Layer 1 w9.84: v1(4435,3380) 4435,3385.53 4437.5,3388.03 4437.5,3647.5 v1(4440,3650)
RFB-: J6.1 R6.1 U1.9 VR1.2 | length 886.9
  Top Layer 1 w9.84: R6.1 4157.05,3503.92 4180.31,3527.18 U1.9
  Top Layer 1 w20: R6.1 4162.05,3165 VR1.2 J6.1
Sync: C4.1 U1.8 U1.11 | length 435.6
  Top Layer 1 w9.84: v1(4120,3470) 4120,3505 4147.17,3532.17 U1.8@4147.17,3564.2 ; v1(4200,3440) 4205,3445 4222.8,3445 4237.8,3460 4237.8,3517.94 4221.26,3534.48 4221.26,3560.67 U1.11
  Top Layer 1 w10: C4.1 4066.64,3564.2 U1.8@4147.17,3564.2
  Bottom Layer 1 w9.84: v1(4120,3470) 4150,3440 v1(4200,3440)
VCC: C5.1 C6.1 P2.1 P2.2 P2.3 P2.4 U1.2 U1.3 | length 294.5
  Top Layer 1 w12: U1.3@4256.18,3614.41 4256.18,3594.72 4307.18,3594.72 ; v1(4310,3625) 4307.18,3622.18 4307.18,3594.72 ; C5.1 4438.4,3585 4437.71,3584.31 4412.29,3584.31 4411.6,3585 4367.91,3585 C6.1 4358.19,3594.72 4307.18,3594.72
pads on no net: R1.1 R3.1 U1.5 U1.6 U1.7 VR1.3

## Polygon pours and split planes (outlines as drawn)
GND on Top Layer "GND_L02_P000" (solid, pour order 0): 3232.7,4385 6280,4385 6280,1825 3237.39,1825
VCC on Bottom Layer "VCC_L03_P001" (solid, pour order 1): 3232.5,1830 3232.5,4367.5 3255,4390 6270,4390 6270,1830

## Silkscreen, mask and mechanical layers (free items; w line width, h text height)
Top Overlay:
  lines w10: 5245,2275 ccw(c5295,2415) 5400.12,2520.12 ; 5315,1830 5315,2260 ; 5420,2325 5885,1860 ; 5455,2420 5975,2420
  text "GND" at 5100,4250 h120
  text "THE" at 3475,4153.33 h200
  text "XCOM_TX_REV1.0" at 3440,3975 h180
  text "ECE Capstone 2025-2026" at 3440,3873.84 h80
  text "VREG" at 5265,3750 h120 r90
  text "VCC" at 3410,3164.89 h120 r90
  text "VFB" at 4820,3085 h120 r90
  text "Res. Measurement" at 6138.78,2725 h120 r90
  text "BIAS_IN" at 3405,2160 h120 r90
  text "Res. Measurement" at 4020,1885.2 h120
Bottom Overlay:
  text "Hi chris!" at 6005,4280.61 h60

## Text inside footprints (layer, text, board x,y; h text height)
U1: Top Overlay "*" at 4320,3565 h50 r180; Top Assembly "*" at 4312.5,3465 h50 r180